# Altium PCB SW-SMD_EVQPUD02K_2023-10-04.pcbdoc
Units mm, origin at the board's own origin, x right, y up, seen from the top; angles counter-clockwise.
Board outline 32.19 x 32.4 mm, 2 copper layers (Top Layer, Bottom Layer); 1 components, 0 nets, 6 pads, 0 vias.
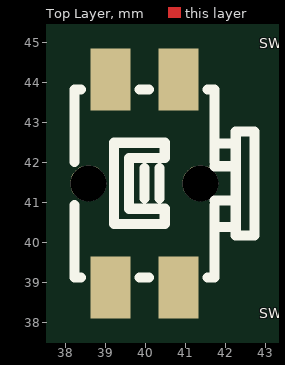
[diagram p0: Top Layer view]
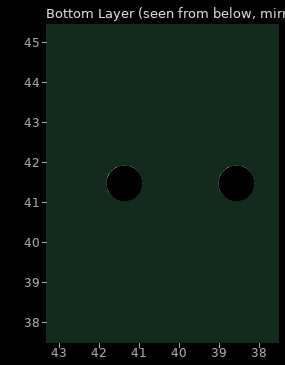
[diagram p1: Bottom Layer view, seen from below]

## Layer stack, top to bottom
Top Layer: signal copper (thickness not stored)
Dielectric: dielectric 0.32, FR-4, Dk 4.8
Bottom Layer: signal copper (thickness not stored)

## Board outline
57.586,25.4 25.4,25.4 25.4,57.804 57.586,57.804

## Components (designator, comment, footprint, x,y, rotation, side; value= is the part's Value field where it differs from the comment)
SW? "SW-SMD_EVQPUD02K" SW-SMD_EVQPUD02K 40.477,41.475 r0 top

## Footprints (in the part's own frame and the unit in brackets; to place one, negate y for a bottom-side part, rotate by r counter-clockwise, add the part's x,y. Pads: shape width x height; smd on the part's side, far side on the other; paste and mask are expansions set on the pad)
SW-SMD_EVQPUD02K [mm]
  rect 1x1.55 smd paste+0 mask+0.051: 1(-1.35,2.6) 2(0.35,2.6) 3(-1.35,-2.6) 4(0.35,-2.6)
  round 0.9 hole 0.9 unplated paste+0: ""(-1.9,0) ""(0.9,0)
  silkscreen extent -2.25,-2.35 2.25,2.35

## Nets (pads, with @x,y where several pads share a name; then routed paths per layer and width w, separated by ;. In a path a pad name is that pad's centre, name@x,y a point inside that pad or via, vN(x,y) a via of type N, cw(c..) or ccw(c..) an arc to the next point about the centre after c; other vN are vias at no path point)
pads on no net: SW?. SW?.1 SW?.2 SW?.3 SW?.4